# Altium PCB Date.PcbDoc
Units mm, origin at the board's own origin, x right, y up, seen from the top; angles counter-clockwise.
Board outline 94 x 33 mm, 2 copper layers (Top Layer, Bottom Layer); 11 components, 43 nets, 157 pads, 61 vias.
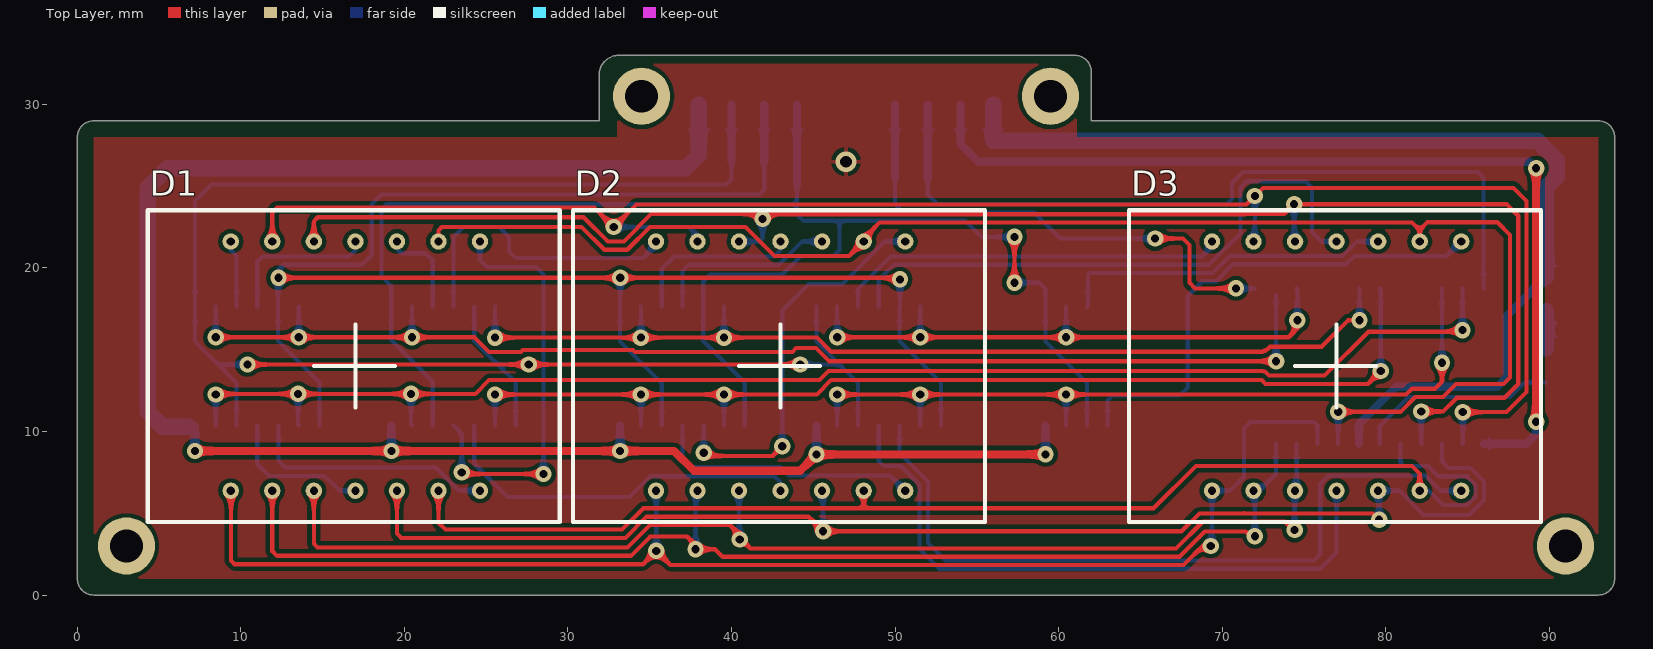
[diagram p0: Top Layer view]
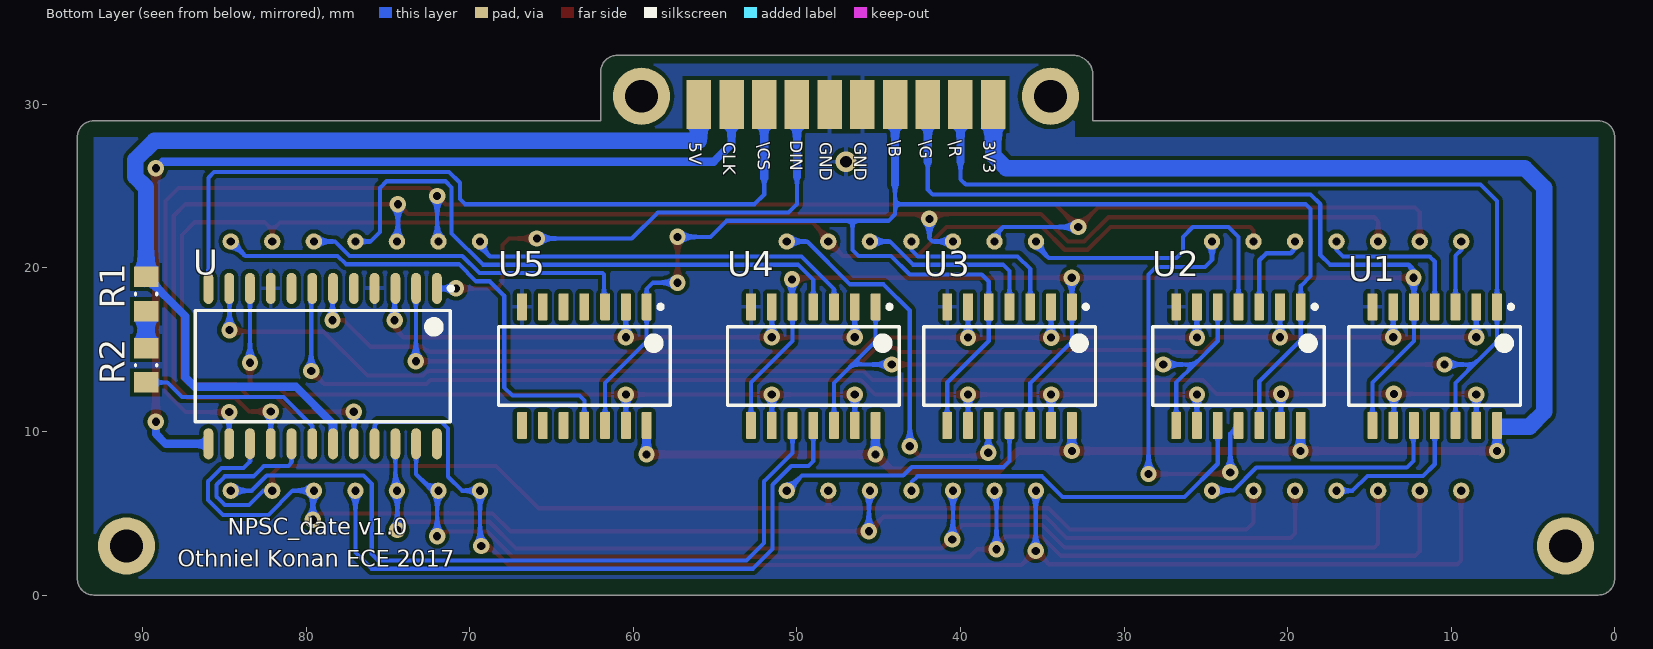
[diagram p1: Bottom Layer view, seen from below]

## Layer stack, top to bottom
Top Solder: solder mask 0.0102, Solder Resist, Dk 3.5
Top Layer: signal copper 0.0356
Dielectric 1: dielectric 0.32, FR-4, Dk 4.8
Bottom Layer: signal copper 0.0356
Bottom Solder: solder mask 0.0102, Solder Resist, Dk 3.5

## Board outline
0,1 0,28 cw(c1,28) 1,29 1,28.997 31.9,29 31.9,31.8 cw(c33.1,31.8) 33.1,33 61,33 cw(c61,32) 62,32 62,29 93,29 cw(c93,28) 94,28 94,1 cw(c93,1) 93,0 1,0 cw(c1,1)

## Design rules (kind name [scope] priority, off if disabled: settings)
Clearance [All] p1: gap=0.254
PolygonConnect [All] p1: connectstyle=Relief reliefconductorwidth=0.254 reliefentries=4 polygonreliefangle="90 Angle" airgapwidth=0.254
RoomDefinition Date [InComponentClass('Date')] p1: confinementstyle=ConfineIn formatcopy=TRUE lockcomponents=FALSE outline -6.2,-42.164 136.084,-42.164 136.084,38.1 -6.2,38.1
RoutingVias [All] p1: holewidth=0.5 width=1 viastyle="Through Hole" minholewidth=0.5 minwidth=1 maxholewidth=0.5 maxwidth=1
SolderMaskExpansion [All] p1: expansion=0.102
Width [All] p1: maxlimit=1 minlimit=0.254 preferedwidth=0.254
30 further rules are at their usual default settings.

## Components (designator, comment, footprint, x,y, rotation, side; value= is the part's Value field where it differs from the comment)
D1 "2 digits 7 segment RGB display" ACD8143 17,14 r0 top
D2 "2 digits 7 segment RGB display" ACD8143 43,14 r0 top
D3 "2 digits 7 segment RGB display" ACD8143 77,14 r0 top
R1 "1K 1% 0805(2012)" RESC0805(2012)_M 89.8,18.4 r270 bottom
R2 "8K2" RESC0805(2012)_M 89.8,14.05 r270 bottom
U "MAX7219" SOIC127P1030X235-24N 79,14 r270 bottom
U1 "CD4011BNSR" NS0014A_N 11,14 r270 bottom
U2 "CD4011BNSR" NS0014A_N 23,14 r270 bottom
U3 "CD4011BNSR" NS0014A_N 37,14 r270 bottom
U4 "CD4011BNSR" NS0014A_N 49,14 r270 bottom
U5 "CD4011BNSR" NS0014A_N 63,14 r270 bottom

## Footprints (in the part's own frame and the unit in brackets; to place one, negate y for a bottom-side part, rotate by r counter-clockwise, add the part's x,y. Pads: shape width x height; smd on the part's side, far side on the other; paste and mask are expansions set on the pad)
ACD8143 [mm]
  round 1 hole 0.5: 1(-7.62,-7.62) 2(-5.08,-7.62) 3(-2.54,-7.62) 4(0,-7.62) 5(2.54,-7.62) 6(5.08,-7.62) 7(7.62,-7.62) 8(7.62,7.62) 9(5.08,7.62) 10(2.54,7.62) 11(0,7.62) 12(-2.54,7.62) 13(-5.08,7.62) 14(-7.62,7.62)
  round 1 on Top Overlay: ""(-11.938,-10.414)
  silkscreen extent -12.7,-9.52 12.5,9.53, body extent -12.7,-9.52 12.45,9.53, height 8
NS0014A_N [mm] "SOIC,14-Leads,Body 10.5x5.6mm,Pitch 1.27mm,IPC Medium Density"
  rrect17% 1.65x0.6 smd: 1(-3.625,3.81) 2(-3.625,2.54) 3(-3.625,1.27) 4(-3.625,0) 5(-3.625,-1.27) 6(-3.625,-2.54) 7(-3.625,-3.81) 8(3.625,-3.81) 9(3.625,-2.54) 10(3.625,-1.27) 11(3.625,0) 12(3.625,1.27) 13(3.625,2.54) 14(3.625,3.81)
  silkscreen extent -3.75,-5.25 2.4,5.25, body extent -2.8,-5.25 2.8,5.25, height 2
RESC0805(2012)_M [mm] "Chip Resistor, Body 2.0x1.3mm, IPC Low Density"
  rect 1.25x1.5 smd: 1(-1.05,0) 2(1.05,0)
  silkscreen extent -0.05,-0.65 0.05,0.65, body extent -1.1,-0.67 1.1,0.67, height 0.7
SOIC127P1030X235-24N [mm] "SOIC, 24-Leads, Body 15.40x7.50mm, Pitch 1.27mm, IPC Medium Density"
  oval 1.9x0.6 smd: 1(-4.75,6.985) 2(-4.75,5.715) 3(-4.75,4.445) 4(-4.75,3.175) 5(-4.75,1.905) 6(-4.75,0.635) 7(-4.75,-0.635) 8(-4.75,-1.905) 9(-4.75,-3.175) 10(-4.75,-4.445) 11(-4.75,-5.715) 12(-4.75,-6.985) 13(4.75,-6.985) 14(4.75,-5.715) 15(4.75,-4.445) 16(4.75,-3.175) 17(4.75,-1.905) 18(4.75,-0.635) 19(4.75,0.635) 20(4.75,1.905) 21(4.75,3.175) 22(4.75,4.445) 23(4.75,5.715) 24(4.75,6.985)
  silkscreen extent -4.87,-7.8 3.4,7.96, body extent -3.8,-7.8 3.8,7.8, height 2.65

## Part data
D1 D2 D3: library part ACD8143
R1: library part CMP-1013-00954-1, "8M45 0.125W 1% 0805 (2012 Metric)  SMD"
R2: library part CMP-1013-00954-1, "8K2 0.125W 1% 0805 (2012 Metric)  SMD"
U: "Serial Interface, 8-Digit LED Display Drivers"
U1 U2 U3 U4 U5: library part CMP-1627-00522-3, "CMOS Quad 2-Input NAND Gate, NS0014A, LARGE T&R"

## Free pads (board coordinates)
  round 3.5 hole 2: 1(34.5,30.5) 2(3,3) 3(91,3) 4(59.5,30.5)
  rect 1.5x3 smd far side: 1(56,30) 2(54,30) 3(52,30) 4(50,30) 5(48,30) 6(46,30) 7(44,30) 8(42,30) 9(40,30) 10(38,30)

## Via types
v1: diameter 1, hole 0.5, Top Layer to Bottom Layer, tented both sides, 60 vias
v2: diameter 1.27, hole 0.711, Top Layer to Bottom Layer, 1 vias

## Nets (pads, with @x,y where several pads share a name; then routed paths per layer and width w, separated by ;. In a path a pad name is that pad's centre, name@x,y a point inside that pad or via, vN(x,y) a via of type N, cw(c..) or ccw(c..) an arc to the next point about the centre after c; other vN are vias at no path point)
3V3: pad.10 U1.14 U2.14 U3.14 U4.14 U5.14 | length 115.3
  Top Layer w0.5: v1(7.19,8.81) v1(19.21,8.81) v1(33.19,8.81) 36.49,8.81 37.7,7.6 44.2,7.6 v1(45.2,8.6) v1(59.2,8.6)
  Bottom Layer w0.5: v1(7.19,8.81) U1.14@7.19,10.3 ; U2.14 19.21,10.355 v1(19.21,8.81) ; v1(33.19,8.81) U3.14 ; U4.14 45.2,10.365 v1(45.2,8.6) ; U5.14 59.2,10.365 v1(59.2,8.6)
  Bottom Layer w1: 6.8,10.3 5.2,10.3 4.3,11.2 4.3,24.9 5.5,26.1 37.2,26.1 38,26.9 pad.10
5V: pad.1@56,30 R1.1 U.19 | length 63.2
  Bottom Layer w0.5: U.19 78.365,10.465 80.637,12.737 86.835,12.737 87.399,13.301 87.399,17.049 R1.1
  Bottom Layer w1: pad.1@56,30 56,27.77 89.304,27.77 90.454,26.619 90.454,25.581 89.8,24.927 R1.1
\B\: pad.7 U2.1 U2.12 U3.5 U3.8 U5.1 U5.12 | length 95.6
  Top Layer w0.254: v1(57.3,19.1) v1(57.3,21.9)
  Bottom Layer w0.254: U2.12 21.73,13.07 19.19,15.61 U2.1 19.19,18.91 18.6,19.5 18.6,23.6 18.9,23.9 44,23.9 ; U3.8 40.81,12.99 38.27,15.53 U3.5 38.27,19.17 38.7,19.6 43.1,19.6 44.239,20.739 46.239,20.739 46.6,21.1 46.6,22.884 ; 44,25.1 44,23.9 ; v1(57.3,19.1) 58.8,19.1 59.19,18.71 U5.1 59.19,15.51 61.73,12.97 U5.12 ; v1(57.3,21.9) 55.284,21.9 54.3,22.884 45.716,22.884 44.4,22.884 44,23.284 44,23.9
  Bottom Layer w0.5: 44,25.1 pad.7
\C\S\: pad.3@52,30 U.12 | length 48
  Bottom Layer w0.254: 52,25.5 52,24.5 52.6,23.9 70.3,23.9 70.611,24.211 70.611,25.211 71.265,25.865 85.635,25.865 85.985,25.515 U.12
  Bottom Layer w0.5: 52,25.5 pad.3@52,30
\G\: pad.8 U1.5 U1.8 U3.1 U3.12 U4.5 U4.8 | length 107
  Top Layer w0.254: v1(12.3,19.4) v1(33.2,19.4) 50.3,19.4 v1(50.3,19.3)
  Bottom Layer w0.254: v1@12.27,19.4 U1.5 12.27,15.53 14.81,12.99 U1.8 ; v1@12.27,19.87 12.6,20.2 17.4,20.2 18,20.8 18,23.9 18.6,24.5 41.7,24.5 42,24.8 42,26.5 ; v1(33.2,19.4) 33.19,19.39 U3.1 33.19,15.51 35.73,12.97 U3.12 ; v1(50.3,19.3) 50.3,17.655 U4.5 50.27,15.53 52.81,12.99 U4.8
  Bottom Layer w0.5: 42,26.5 pad.8
\R\: pad.9 U1.1 U1.12 U2.5 U2.8 U4.1 U4.12 | length 109.2
  Top Layer w0.254: v1(10.4,14.1) v1(27.6,14.1) v1(44.2,14.1)
  Bottom Layer w0.254: U1.12 9.73,12.97 8.6,14.1 ; v1(10.4,14.1) 8.6,14.1 ; U2.5 24.27,15.53 25.7,14.1 ; U2.8 26.81,12.99 25.7,14.1 ; v1(27.6,14.1) 25.7,14.1 ; 40,26.5 40,25.422 39.678,25.1 8.2,25.1 7.19,24.09 U1.1 7.19,15.51 8.6,14.1 ; v1(44.2,14.1) 46.6,14.1 ; U4.1 45.19,15.51 46.6,14.1 ; U4.12 47.73,12.97 46.6,14.1
  Bottom Layer w0.5: 40,26.5 pad.9
A: D1.13 D2.13 D3.13 U.14 | length 107.1
  Top Layer w0.254: D1.13 11.92,23.42 12.2,23.7 31.602,23.7 v1(32.801,22.501) 34.181,23.881 71.481,23.881 v1(72,24.4) 72.5,24.9 87.818,24.9 88.616,24.102 88.616,12.416 87.384,11.184 84.716,11.184 v1(84.715,11.185)
  Bottom Layer w0.254: v1(32.801,22.501) 37.399,22.501 38.1,21.8 D2.13 ; D3.13 72,21.7 v1(72,24.4) ; U.14 v1(84.715,11.185)
B: D1.12 D2.12 D3.12 U.16 | length 101
  Top Layer w0.254: D1.12 14.46,22.86 14.7,23.1 30.956,23.1 32.436,21.62 33.416,21.62 35.088,23.292 41.608,23.292 v1(41.9,23) 42.189,23.289 71.405,23.289 71.416,23.3 73.8,23.3 v1(74.4,23.9) 87.4,23.9 88.108,23.192 88.108,12.908 87.266,12.066 84.35,12.066 83.509,11.225 v1(82.175,11.225)
  Bottom Layer w0.254: D2.12 41.72,21.62 41.9,21.8 v1(41.9,23) ; v1(74.4,23.9) 74.4,21.68 D3.12 ; U.16 v1(82.175,11.225)
B0: D1.10 U2.3 | length 5.8
  Bottom Layer w0.254: D1.10 19.54,21.16 19.8,20.9 21.3,20.9 21.73,20.47 U2.3
B1: D1.8 U2.11 | length 25.7
  Top Layer w0.254: v1(23.5,7.5) 23.6,7.4 v1(28.5,7.4)
  Bottom Layer w0.254: U2.11 23.5,9.875 v1(23.5,7.5) ; D1.8 24.62,20.48 25.038,20.062 28.038,20.062 28.5,19.6 v1(28.5,7.4)
B2: D2.10 U3.4 | length 11.5
  Bottom Layer w0.254: U3.4 37.008,17.633 37.008,19.808 37.4,20.2 42.9,20.2 44.32,21.62 D2.10
B3: D2.8 U3.10 | length 24.5
  Top Layer w0.254: v1(38.3,8.7) 38.3,8.5 42.5,8.5 v1(43.1,9.1)
  Bottom Layer w0.254: U3.10 38.3,10.345 v1(38.3,8.7) ; v1(43.1,9.1) 43.1,17.4 44.7,19 46.751,19 49.371,21.62 D2.8
B4: D3.10 U5.3 | length 20.6
  Bottom Layer w0.254: U5.3 61.8,17.695 61.8,19.6 61.892,19.692 69.416,19.692 70.463,20.739 77.365,20.739 78.246,21.62 D3.10
B5: D3.8 U5.11 | length 30.5
  Bottom Layer w0.254: U5.11 63,11.9 63.3,12.2 67.4,12.2 67.9,12.7 67.9,18.3 68.784,19.184 69.627,19.184 70.674,20.231 77.575,20.231 78.083,20.739 83.739,20.739 D3.8
C: D1.9 D2.9 D3.9 U.20 | length 92.6
  Top Layer w0.254: D1.9 22.08,22.3 22.281,22.501 30.837,22.501 32.226,21.112 33.626,21.112 35.015,22.501 35.835,22.501 35.844,22.511 40.863,22.511 42.635,20.739 47.199,20.739 D2.9 48.08,21.8 49.061,22.781 81.619,22.781 82.08,22.32 ; v1(77.095,11.205) 80.909,11.205 81.81,12.106 83.506,12.106 84.3,12.9 87.2,12.9 87.6,13.3 87.6,22.023 86.823,22.8 82.56,22.8 82.08,22.32 ; D3.9 82.08,22.32
  Bottom Layer w0.254: U.20 v1(77.095,11.205)
CLK: pad.2@54,30 U.13 | length 57.9
  Top Layer w0.5: v1(89.2,10.6) v1(89.2,26.1)
  Bottom Layer w0.5: pad.2@54,30 54,27.589 55.089,26.5 59.891,26.5 59.895,26.496 88.804,26.496 v1(89.2,26.1) ; U.13 88.6,9.25 89.2,9.85 v1(89.2,10.6)
D: D1.2 D2.2 D3.2 U.23 | length 76.2
  Top Layer w0.254: D1.2 11.92,2.68 12.2,2.4 33.854,2.4 35.035,3.581 37.281,3.581 v1@37.8,3.062 ; v1(37.8,2.8) 39,2.8 39.461,2.339 67.393,2.339 68.935,3.881 71.441,3.881 71.722,3.6 v1(72,3.6)
  Bottom Layer w0.254: v1(37.8,2.8) 37.8,6.26 D2.2 ; v1@72,3.26 71.8,3.46 71.94,3.6 v1(72,3.6) 72,6.3 D3.2 72.28,6.38 73.285,7.385 U.23
D0: U1.2 U1.6 U2.2 U.2 | length 75.4
  Top Layer w0.254: v1(8.46,15.76) v1(13.54,15.76) v1(20.46,15.76) 24.274,15.76 25.175,14.859 25.905,14.859 25.911,14.865 27.119,14.865 27.235,14.981 33.961,14.981 33.967,14.975 33.979,14.975 34.095,14.859 34.825,14.859 34.831,14.865 39.169,14.865 39.175,14.859 39.905,14.859 39.911,14.865 43.719,14.865 43.954,15.1 45.156,15.1 45.956,14.3 v1(73.3,14.3)
  Bottom Layer w0.254: v1(8.46,15.76) U1.2 ; v1(13.54,15.76) U1.6 ; v1(20.46,15.76) U2.2 ; v1(73.3,14.3) U.2@73.3,18.335
D1: U1.9 U1.13 U2.13 U.11 | length 86.4
  Top Layer w0.254: v1(8.46,12.26) 8.5,12.3 v1(13.5,12.3) v1(20.4,12.3) 24.334,12.3 25.175,13.141 45.377,13.141 45.936,13.7 72.48,13.7 72.514,13.666 72.615,13.666 72.862,13.419 76.265,13.419 78.946,16.1 84.6,16.1 v1(84.7,16.2)
  Bottom Layer w0.254: U1.13 v1(8.46,12.26) ; v1(13.5,12.3) 13.5,10.415 U1.9 ; v1(20.4,12.3) 20.4,10.435 U2.13 ; v1(84.7,16.2) 84.7,18.735 U.11
D2: U2.6 U3.2 U3.6 U.6 | length 61.6
  Top Layer w0.254: v1(25.54,15.74) v1(34.46,15.74) v1(39.54,15.74) 45.234,15.74 46.095,14.879 72.459,14.879 72.48,14.901 72.536,14.901 72.569,14.934 72.615,14.934 72.653,14.973 72.689,14.973 72.733,15.016 72.758,15.016 72.923,15.181 76.081,15.181 77.7,16.8 v1(78.4,16.8)
  Bottom Layer w0.254: v1(25.54,15.74) U2.6 ; v1(34.46,15.74) U3.2 ; v1(39.54,15.74) U3.6 ; U.6 78.4,18.715 v1(78.4,16.8)
D3: U2.9 U3.9 U3.13 U.7 | length 65.7
  Top Layer w0.254: v1(25.54,12.26) v1(34.46,12.26) v1(39.54,12.26) 45.214,12.26 46.095,13.141 72.421,13.141 72.651,12.911 78.911,12.911 v1(79.7,13.7)
  Bottom Layer w0.254: U2.9 v1(25.54,12.26) ; U3.13 v1(34.46,12.26) ; U3.9 v1(39.54,12.26) ; U.7 79.7,18.685 v1(79.7,13.7)
D4: U4.2 U4.6 U5.2 U.3 | length 36.4
  Top Layer w0.254: v1(46.46,15.76) v1(51.54,15.76) v1(60.46,15.76) 74.06,15.76 74.6,16.3 v1(74.6,16.8)
  Bottom Layer w0.254: v1(46.46,15.76) U4.2 ; v1(51.54,15.76) U4.6 ; v1(60.46,15.76) U5.2 ; U.3 74.6,18.705 v1(74.6,16.8)
D5: U4.9 U4.13 U5.13 U.10 | length 48.7
  Top Layer w0.254: v1(46.46,12.26) v1(51.54,12.26) v1(60.46,12.26) 81.246,12.26 81.6,12.614 83.014,12.614 83.445,13.045 v1(83.445,14.206)
  Bottom Layer w0.254: U4.13 v1(46.46,12.26) ; U4.9 v1(51.54,12.26) ; U5.13 v1(60.46,12.26) ; v1(83.445,14.206) U.10
DIN: pad.4@50,30 U.1 | length 31.6
  Top Layer w0.254: v1(65.9,21.8) 67.6,21.8 68,21.4 68,19.1 68.35,18.75 v1(70.85,18.75)
  Bottom Layer w0.254: 50,25.6 50,23.9 50.508,23.392 58.508,23.392 60.1,21.8 v1(65.9,21.8) ; v1(70.85,18.75) U.1
  Bottom Layer w0.5: 50,25.6 pad.4@50,30
DP: D1.3 D2.3 D3.3 U.22 | length 73.8
  Top Layer w0.254: D1.3 14.46,3.14 14.692,2.908 33.644,2.908 35.019,4.283 39.917,4.283 v1@40.5,3.7 ; v1(40.5,3.4) 40.5,3.5 41.153,2.847 67.183,2.847 68.817,4.481 73.857,4.481 74.431,3.908 v1(74.431,3.975)
  Bottom Layer w0.254: D2.3 40.46,3.44 v1(40.5,3.4) ; v1(74.431,3.975) 74.431,6.351 D3.3 74.555,6.475 U.22
E: D1.1 D2.1 D3.1 U.21 | length 84.2
  Top Layer w0.254: D1.1 9.4,6.36 9.4,2.1 9.616,1.884 34.584,1.884 v1(35.4,2.7) 36.269,1.831 67.631,1.831 68.8,3 v1(69.3,3)
  Bottom Layer w0.254: D2.1 35.4,6.36 v1(35.4,2.7) ; v1(69.3,3) 69.3,2.8 69.38,2.72 D3.1 70.48,6.38 71.334,7.234 71.334,10.182 71.733,10.581 75.619,10.581 75.825,10.375 U.21
F: D1.5 D2.5 D3.5 U.15 | length 81.4
  Top Layer w0.254: D1.5 19.54,3.76 19.808,3.492 33.509,3.492 34.809,4.791 44.709,4.791 v1(45.6,3.9) 67.517,3.9 68.608,4.991 71.327,4.991 71.336,5 71.345,4.991 79.209,4.991 v1(79.6,4.6)
  Bottom Layer w0.254: D2.5 45.6,6.32 v1(45.6,3.9) ; v1(79.6,4.6) 79.6,6.32 D3.5 80.834,6.38 82.314,4.9 85.104,4.9 86.009,5.805 86.009,6.955 85.195,7.769 83.831,7.769 83.445,8.155 U.15
G: D1.6 D2.6 D3.6 U.17 | length 77.1
  Top Layer w0.254: D1.6 22.08,4.42 22.5,4 33.299,4 34.607,5.308 48.08,5.308 ; D2.6 48.08,5.308 ; D3.6 82.08,7.42 81.6,7.9 68.4,7.9 65.808,5.308 48.08,5.308
  Bottom Layer w0.254: U.17 80.905,8.105 80.9,8.1 81.1,7.9 82.6,7.9 83.239,7.261 84.985,7.261 85.501,6.745 85.501,6.015 84.985,5.499 83.501,5.499 82.62,6.38 D3.6
G0: D1.11 U1.4 | length 9.6
  Bottom Layer w0.254: U1.4 11,20.4 11.308,20.708 16.608,20.708 17,21.1 D1.11
G1: D1.7 U1.10 | length 15.3
  Bottom Layer w0.254: U1.10 12.308,10.337 12.308,8.192 12.708,7.792 21.914,7.792 23.306,6.4 D1.7@24.62,6.4
G2: D2.11 U3.3 | length 10.6
  Bottom Layer w0.254: U3.3 35.73,19.93 36.508,20.708 42.608,20.708 43,21.1 D2.11
G3: D2.7 U3.11 | length 16.6
  Bottom Layer w0.254: U3.11 37,8.2 37.381,7.819 38.805,7.819 38.808,7.822 42.978,7.822 43.5,7.3 49.7,7.3 D2.7
G4: D3.11 U4.4 | length 36.9
  Bottom Layer w0.254: U4.4 49,19.263 49.937,20.2 69.206,20.2 71.119,22.113 71.119,24.919 71.5,25.3 75.1,25.3 75.499,24.901 75.499,22.201 76.08,21.62 D3.11
G5: D3.7 U4.10 | length 46
  Bottom Layer w0.254: U4.10 50.27,8.694 52.009,6.955 52.009,3.191 53.081,2.119 75.619,2.119 76,2.5 76,6.8 76.5,7.3 82.418,7.3 83.338,6.38 D3.7
GND: pad.5 pad.6 U1.7 U2.7 U3.7 U4.7 U5.7 U.4 U.9
  other v2: 47,26.5
ISET: R2.2 U.18 | length 12.4
  Bottom Layer w0.254: U.18 79.635,10.335 81.406,12.106 87.606,12.106 88.5,13 R2.2
NetR1_2: R1.2 R2.1 | length 2.2
  Bottom Layer w1: R2.1 R1.2
R0: D1.14 U1.3 | length 4.1
  Bottom Layer w0.254: D1.14 9.38,21.1 9.73,20.75 U1.3
R1: D1.4 U1.11 | length 9
  Bottom Layer w0.254: U1.11 11,8 11.716,7.284 15.116,7.284 16.02,6.38 D1.4
R2: D2.14 U2.4 | length 18.8
  Bottom Layer w0.254: U2.4 23,21.9 23.601,22.501 25.799,22.501 26.4,21.9 26.4,21 26.8,20.6 34.6,20.6 35.38,21.38 D2.14
R3: D2.4 U2.10 | length 22.6
  Bottom Layer w0.254: U2.10 24.27,8.03 26.3,6 33.754,6 35.015,7.261 42.639,7.261 43,6.9
R4: D3.14 U4.3 | length 24.1
  Bottom Layer w0.254: U4.3 47.73,18.712 49.726,20.708 68.771,20.708 69.38,21.317 D3.14
R5: D3.4 U4.11 | length 39.4
  Bottom Layer w0.254: U4.11 49,8.2 49.3,7.9 50.346,7.9 51.501,6.745 51.501,6.015 51.492,6.006 51.492,2.808 52.689,1.611 76.011,1.611 77,2.6 D3.4
pads on no net: D1. D2. D3. U5.4 U5.5 U5.6 U5.8 U5.9 U5.10 U.5 U.8 U.24

## Polygon pours and split planes (outlines as drawn)
GND on Bottom Layer "GND_L02_P000" (solid, remove dead copper, pour order 0): 1,1 1,28 33,28 33,32.5 61.1,32.5 61.1,28 93,28 93,1.1 92.9,1
GND on Top Layer "GND_L01_P001" (solid, remove dead copper, pour order 1): 1,1 1,28 33,28 33,32.5 61.1,32.5 61.1,28 93,28 93,1.1 92.9,1

## Silkscreen, mask and mechanical layers (free items; w line width, h text height)
Bottom Overlay:
  text "3V3" at 38.6,27.8 h0.75 r90
  text "\R" at 40.7,27.8 h0.75 r90
  text "\G" at 42.5,27.8 h0.75 r90
  text "\B" at 44.4,27.8 h0.75 r90
  text "DIN" at 50.4,27.8 h0.75 r90
  text "GND" at 46.5,27.7 h0.75 r90
  text "GND" at 48.6,27.7 h0.75 r90
  text "\CS" at 52.4,27.7 h0.75 r90
  text "CLK" at 54.5,27.7 h0.75 r90
  text "5V" at 56.6,27.7 h0.75 r90
  text "NPSC_date v1.0" at 84.8,3.7 h1
  text "Othniel Konan ECE 2017" at 87.875,1.725 h1
Mechanical 1:
  lines w0.25: 0,1 0,28 ; 1,0 93,0 ; 1,28.997 31.9,29 31.9,31.8 ; 33.1,33 61,33 ; 62,32 62,29 93,29 ; 94,1 94,28
  lines w0.254: 0,1 ccw(c1,1) 1,0 ; 0,28 cw(c1,28) 1,29 ; 31.9,31.8 cw(c33.1,31.8) 33.1,33 ; 61,33 cw(c61,32) 62,32 ; 93,0 ccw(c93,1) 94,1 ; 93,29 cw(c93,28) 94,28